# Allegro board SATROT-2-7.brd
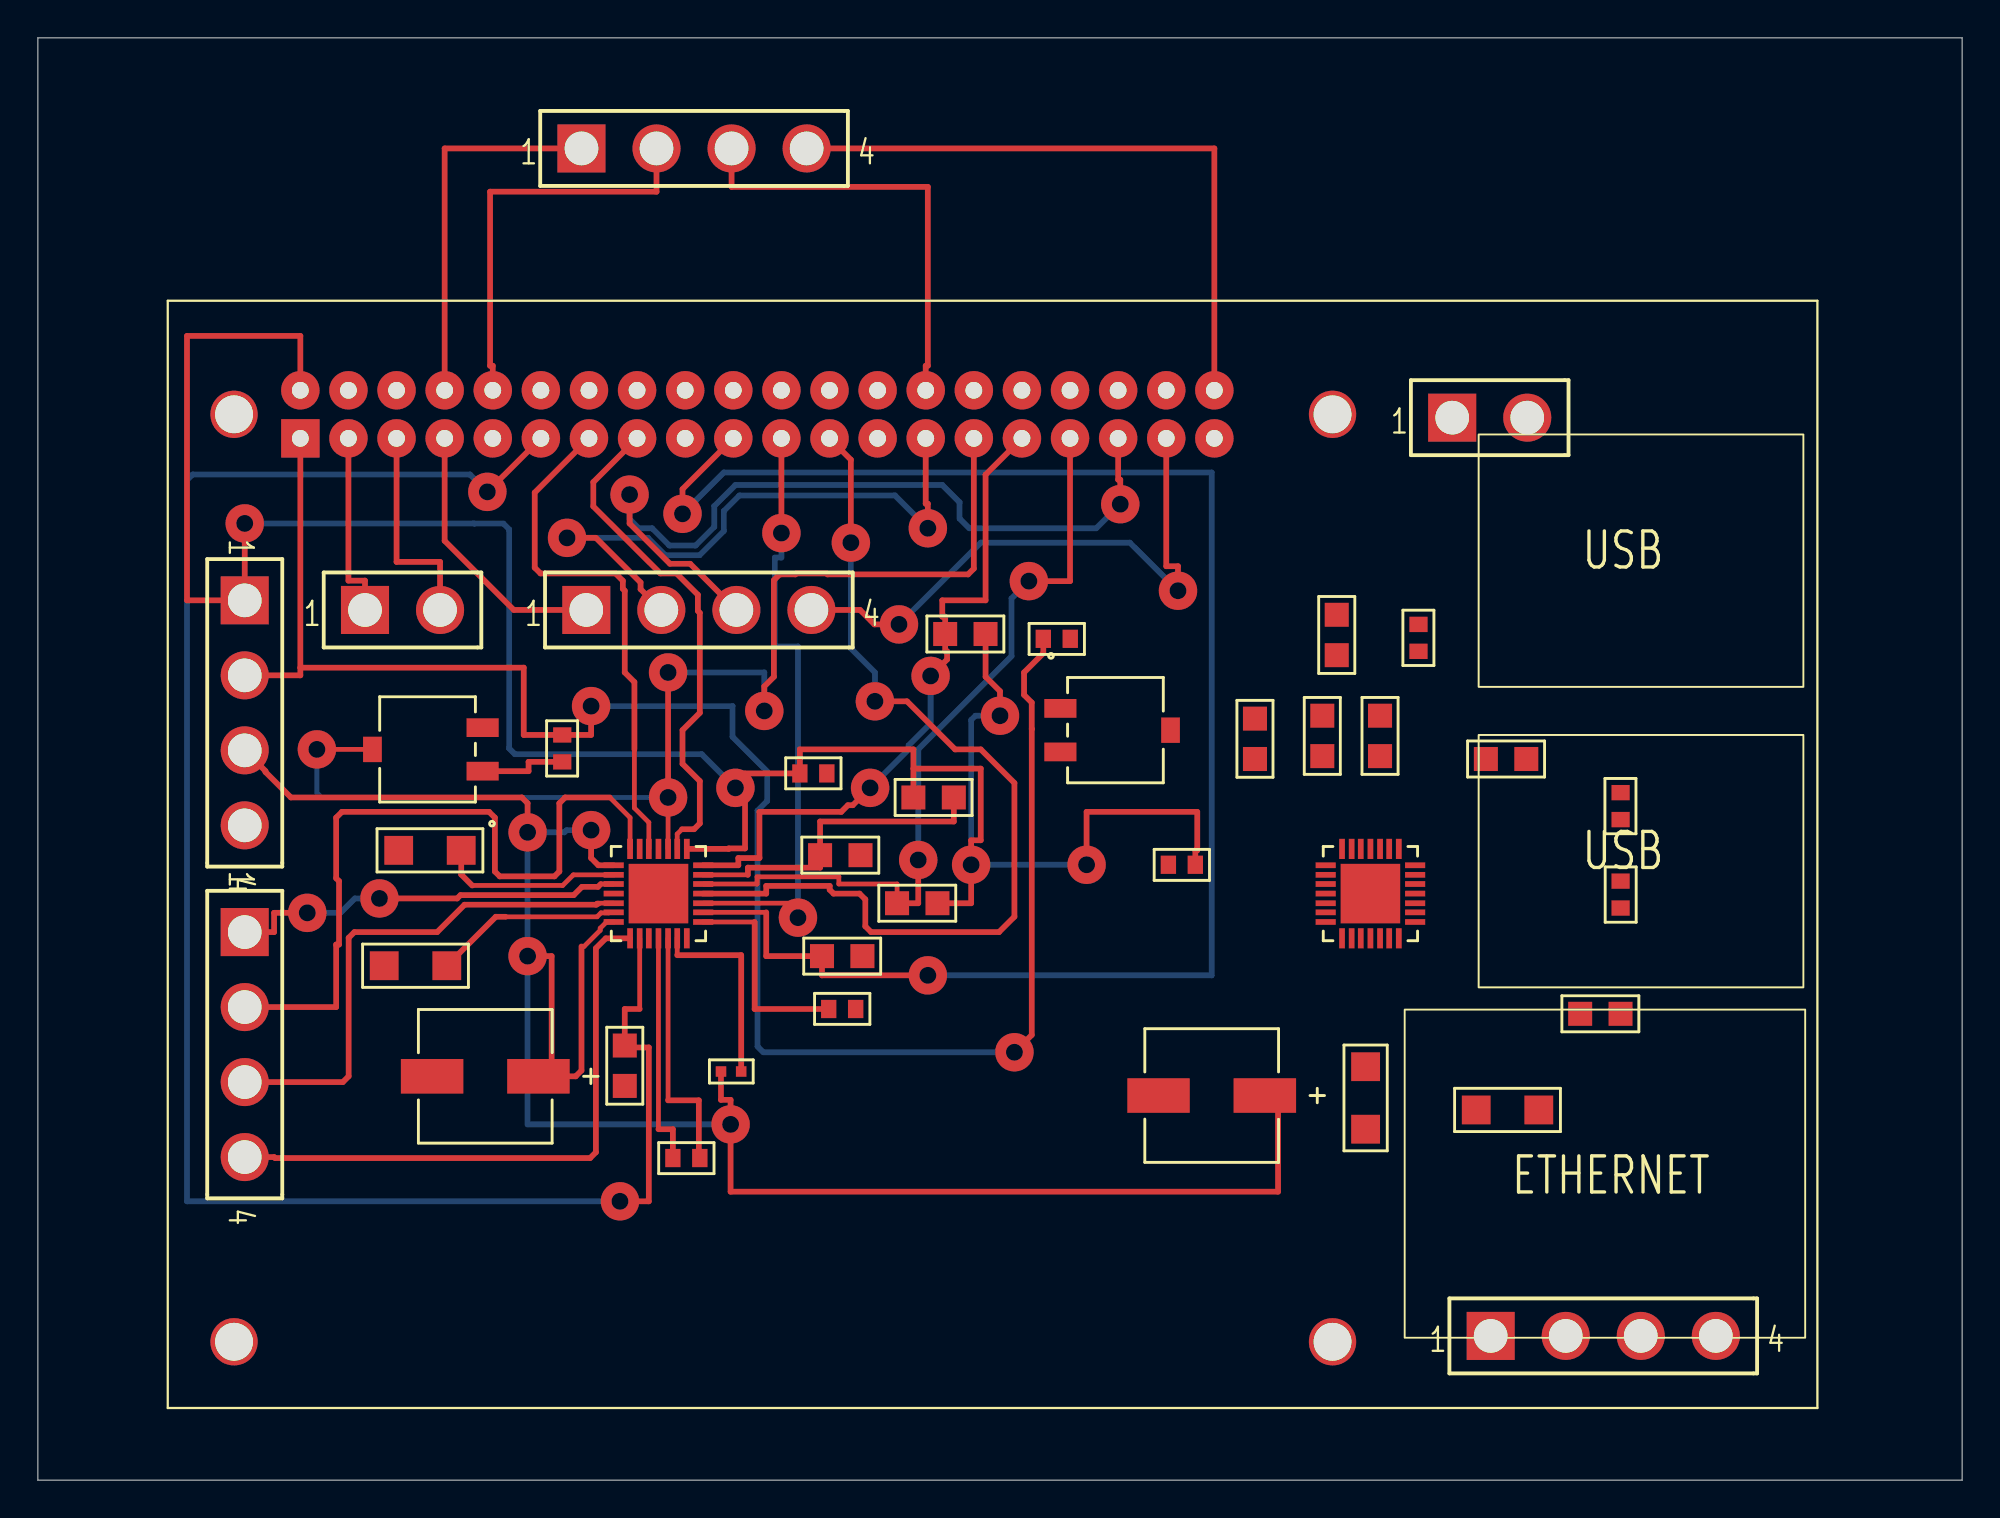
[diagram p0: board, top side]
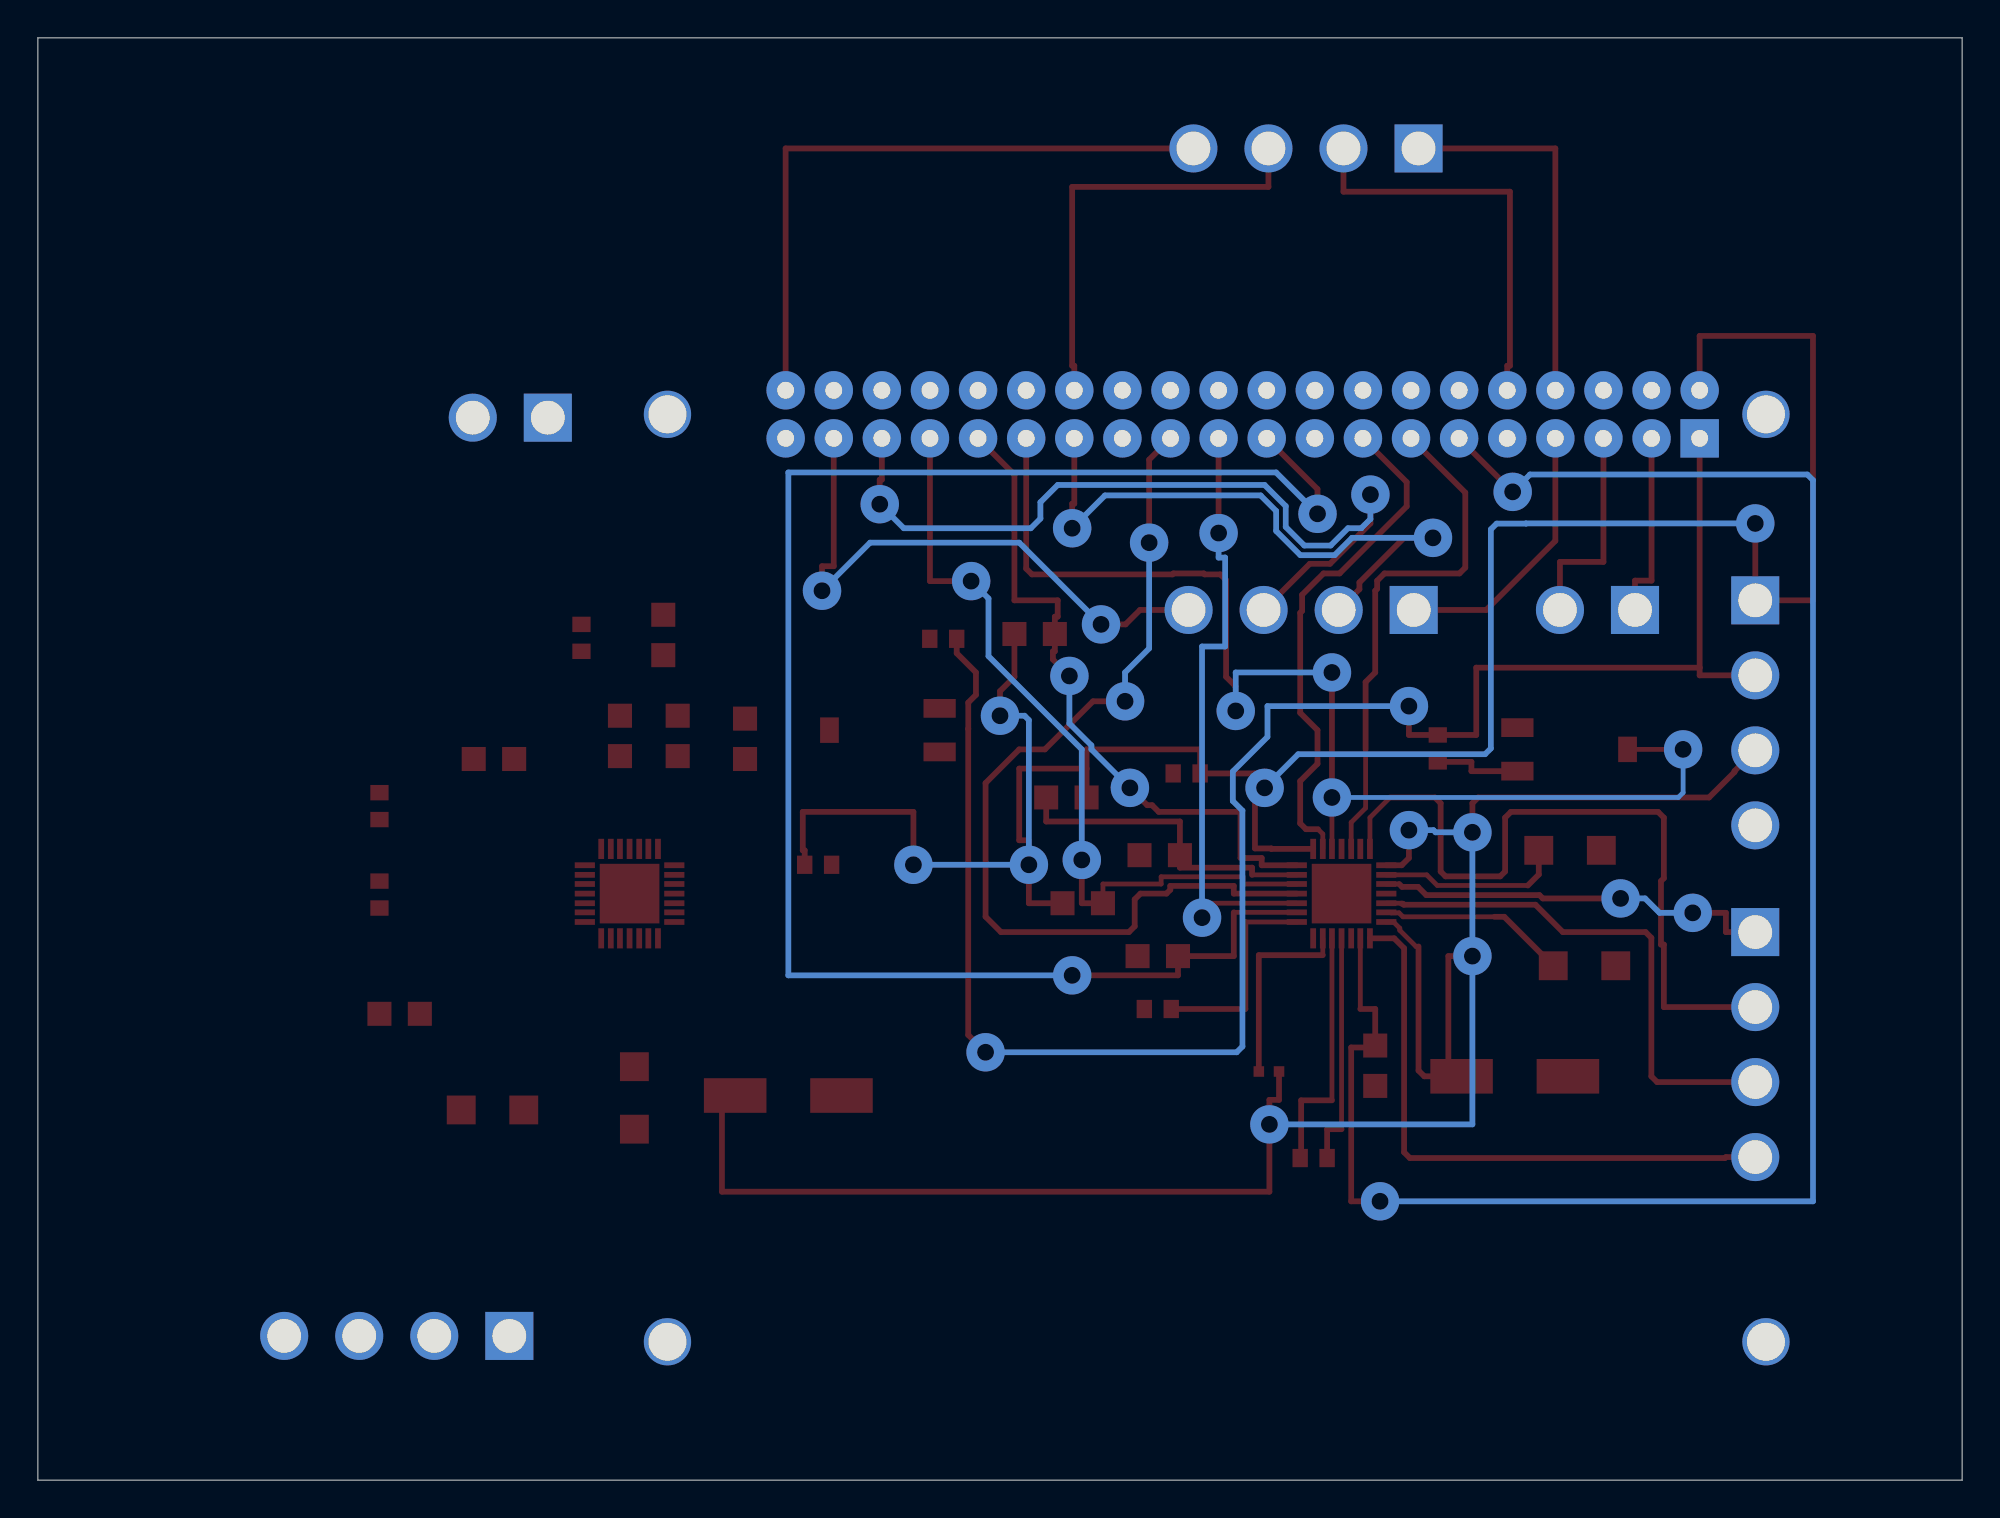
[diagram p1: board, bottom side, seen from below]

Outline 101.6 x 76.2 mm; copper layers: TOP, BOTTOM. Coordinates in mm from the lower left corner of the outline.
Outline path: 0,76.2 101.6,76.2 101.6,0 0,0 0,76.2

## Design rules (mm)
constraint set DEFAULT: min track width 0.305

## Placement (name value [footprint] x y rotation side)
C1  0.1 uF  [SMC0603]  33.53 17.02 0 top
C2  0.22 uF  [SMC0603]  43.18 24.89 180 top
C3  0.1 uF  [SMC0402]  36.07 21.59 0 top
C4  100 uF  [PCAP_SVP_C6-M]  23.62 21.34 180 top
C5  0.22 uF  [SMC0603]  41.66 37.34 180 top
C6  0.1 uF  [SMC0603]  83.57 30.23 90 top
C7  0.22 uF  [SMC0603]  72.9 45.21 270 top
C8  0.1 uF  [SMC0603]  83.57 36.32 270 top
C9  100 uF  [PCAP_SVP_C6-M]  61.98 20.32 180 top
C10  0.22 uF  [SMC0603]  59.69 32.51 0 top
J2  Az Stepper  [BLKCON156VHTM1SQSW1564]  10.92 28.96 270 top
J3  Motor Power  [BLKCON156VHTM1SQSW1562]  74.68 56.13 0 top
J4  Power Connector  [BLKCON156VHTM1SQSW1564]  10.92 46.48 270 top
J5  El Stepper  [BLKCON156VHTM1SQSW1564]  76.71 7.62 0 top
J6  R_PINs  [BLKCON156VHTM1SQSW1564]  28.7 70.36 0 top
J7  L_PINs  [BLKCON156VHTM1SQSW1564]  28.96 45.97 0 top
J8  I2C  [BLKCON156VHTM1SQSW1562]  17.27 45.97 0 top
R1  10K  [SMR0805]  43.43 33.02 180 top
R2  NP  [SMR0805]  46.23 36.07 0 top
R3  100k  [SMR0805]  47.5 30.48 180 top
R4  100k  [SMR0805]  50.04 44.7 180 top
R5  10K POT  [SOT_10KLFTR]  20.57 38.61 90 top
R6  20K  [SMR0603]  27.69 39.37 270 top
R7  NP  [SMR0805]  41.4 27.69 0 top
R8  100k  [SMR0805]  30.99 20.83 90 top
R9  0.05  [SMR1206]  22.35 33.27 180 top
R10  0.05  [SMR1206]  21.59 27.18 180 top
R11  10K  [SMR0805]  68.58 45.72 270 top
R12  NP  [SMR0805]  67.82 40.39 270 top
R13  100k  [SMR0805]  70.87 40.39 270 top
R14  100k  [SMR0805]  64.26 38.1 90 top
R15  10K POT  [SOT_10KLFTR]  56.9 39.62 270 top
R16  20K  [SMR0603]  53.09 44.45 0 top
R17  NP  [SMR0805]  76.45 38.1 0 top
R18  100k  [SMR0805]  83.57 24.64 180 top
R19  0.05  [SMR1206]  70.1 21.84 270 top
R20  0.05  [SMR1206]  75.95 19.56 0 top
U1  A4988SETTR-T  [QFN50P500X500X100-29N]  32.77 30.99 90 top
U2  A4988SETTR-T  [QFN50P500X500X100-29N]  70.36 30.99 180 top
U3  Raspberry Pi B+  [GU-RASP-PI-3]  6.86 3.81 0 top

## Library data of the parts
C1-C3 C5-C8 C10 = CAP NP
C4 C9 = CAP POL: User Part Number: PN; Tolerance: TOL
J2 J4-J7 = 4 HEADER
J3 = CON2
J8 = HEADER 2
R1-R4 R6-R14 R16-R20 = R
R5 R15 = POT: User Part Number: PN; Tolerance: TOL
U1 U2 = A4988SETTR-T
U3 = Raspberry Pi B+

## Footprints (pads in the part's own frame, mm; a bottom-side part is the same pattern mirrored in y, then rotated)
BLKCON156VHTM1SQSW1562
  rect 2.54x2.54 hole 1.778: 1(0,0)
  round 2.54 hole 1.778: 2(3.962,0)
BLKCON156VHTM1SQSW1564
  rect 2.54x2.54 hole 1.778: 1(0,0)
  round 2.54 hole 1.778: 2(3.962,0) 3(7.925,0) 4(11.887,0)
GU-RASP-PI-3
  round 2.5 hole 2 unplated: (3.5,52.5) (3.5,3.5) (61.5,52.5) (61.5,3.5)
  rect 2.032x2.032 hole 0.889: 1(7,51.23)
  round 2.032 hole 0.889: 2(7,53.77) 3(9.54,51.23) 4(9.54,53.77) 5(12.08,51.23) 6(12.08,53.77) 7(14.62,51.23) 8(14.62,53.77) 9(17.16,51.23) 10(17.16,53.77) 11(19.7,51.23) 12(19.7,53.77) 13(22.24,51.23) 14(22.24,53.77) 15(24.78,51.23) 16(24.78,53.77) 17(27.32,51.23) 18(27.32,53.77) 19(29.86,51.23) 20(29.86,53.77) 21(32.4,51.23) 22(32.4,53.77) 23(34.94,51.23) 24(34.94,53.77) 25(37.48,51.23) 26(37.48,53.77) 27(40.02,51.23) 28(40.02,53.77) 29(42.56,51.23) 30(42.56,53.77) 31(45.1,51.23) 32(45.1,53.77) 33(47.64,51.23) 34(47.64,53.77) 35(50.18,51.23) 36(50.18,53.77) 37(52.72,51.23) 38(52.72,53.77) 39(55.26,51.23) 40(55.26,53.77)
PCAP_SVP_C6-M
  rect 3.302x1.829 smd: 1(-2.807,0) 2(2.807,0)
QFN50P500X500X100-29N
  rect 1.067x0.305 smd: 1(-2.362,1.499) 2(-2.362,0.991) 3(-2.362,0.508) 4(-2.362,0) 5(-2.362,-0.508) 6(-2.362,-0.991) 7(-2.362,-1.499) 15(2.362,-1.499) 16(2.362,-0.991) 17(2.362,-0.508) 18(2.362,0) 19(2.362,0.508) 20(2.362,0.991) 21(2.362,1.499)
  rect 0.305x1.067 smd: 8(-1.499,-2.362) 9(-0.991,-2.362) 10(-0.508,-2.362) 11(0,-2.362) 12(0.508,-2.362) 13(0.991,-2.362) 14(1.499,-2.362) 22(1.499,2.362) 23(0.991,2.362) 24(0.508,2.362) 25(0,2.362) 26(-0.508,2.362) 27(-0.991,2.362) 28(-1.499,2.362)
  rect 3.15x3.15 smd: 29(0,0)
SMC0402
  rect 0.559x0.559 smd: 1(0,0) 2(1.067,0)
SMC0603
  rect 0.813x0.965 smd: 1(0,0) 2(1.422,0)
SMR0603
  rect 0.813x0.965 smd: 1(0,0) 2(1.422,0)
SMR0805
  rect 1.27x1.27 smd: 1(0,0) 2(2.134,0)
SMR1206
  rect 1.524x1.524 smd: 1(0,0) 2(3.302,0)
SOT_10KLFTR
  rect 0.991x1.702 smd: 1(-1.15,-2.908) 3(1.15,-2.908)
  rect 1.346x0.991 smd: 2(0,2.908)

## Nets
3V3: J4.2 R6.1 R16.1 U3.1
GND: C2.1 C4.2 C5.1 C7.1 C9.2 C10.1 J3.2 J4.4 R1.1 R5.3 R7.2 R8.1 R9.2 R10.2 R11.1 R15.3 R17.2 R18.1 R19.2 R20.2 U1.3 U1.18 U1.29 U2.3 U2.18 U2.29 U3.9
GND1: U3.6
GND3: U3.14
GND4: U3.20
GND5: U3.25
GND6: U3.30
GND7: U3.34
GND8: U3.39
P3V3: U3.17
P5V: U3.4(P5V#4)
VDD: C5.2 C10.2 J4.1 R2.1 R3.1 R4.1 R12.1 R13.1 R14.1 U1.15 U2.15 U3.2
7/GPIO: J7.1 U3.7
19/GPIO: J7.3 U3.35
27/RESERVED: J7.2 U3.27
28/RESERVED: J6.3 U3.28
37/GPIO: J7.4 U3.37
GPIO: J6.4 U3.40
GPIO/RX: J6.2 U3.10
GPIO/TX: J6.1 U3.8
VMM: C3.1 C4.1 C8.1 C9.1 J3.1 J4.3 U1.22 U1.28 U2.22 U2.28
N00486: J2.1 U1.24
N00488: J2.2 U1.21
N00490: J2.3 U1.26
N00492: J2.4 U1.1
N00665: R1.2 R2.2 U1.13
N00675: R3.2 U1.12 U3.33
N00682: R4.2 U1.14(~SLEEP) U3.31
N00813: R5.1 R6.2
N01051: R5.2(WIPER) U1.17 U3.29
N01158: R8.2 U1.2 U3.11
N01167: R7.1 U1.9 U3.19
N01261: R10.1 U1.27
N01273: R9.1 U1.23
N01454: C1.1 U1.4
N01461: C1.2 U1.5
N01528: C2.2 U1.8
N01594: C3.2 U1.6
N04587: J5.1 U2.24
N04591: J5.2 U2.21
N04595: J5.3 U2.26
N04599: J5.4 U2.1
N04699: R11.2 R12.2 U2.13
N04707: R13.2 U2.12 U3.38
N04715: R14.2 U2.14(~SLEEP) U3.36
N04769: R15.1 R16.2
N04789: R15.2(WIPER) U2.17 U3.32
N04853: R18.2 U2.2 U3.12
N04861: R17.1 U2.9 U3.22
N04909: R20.1 U2.27
N04921: R19.1 U2.23
N04961: C6.1 U2.4
N04969: C6.2 U2.5
N04997: C7.2 U2.8
N05017: C8.2 U2.6
N05607: U1.19 U3.13
N05619: U1.16 U3.15
N05647: U1.10 U3.21
N05659: U1.11 U3.23
N05690: U2.19 U3.16
N05705: U2.16 U3.18
N05729: U2.10 U3.24
N05742: U2.11 U3.26
N09636: J8.1 U3.3
N09640: J8.2 U3.5

Pads without a net: U1 7 20 25; U2 7 20 25

## Via types
v1: diameter 2.032, hole 0.889, TOP to BOTTOM, 35 vias

## Routing (per net, layer and track width the routed paths; a pad name or vN(x,y) marks a point on that pad's centre or on a via; arc(x,y) is an arc through that point)
3V3: length 98.8
  TOP w0.305: 13.86,42.93 U3.1 ; 13.86,42.93 13.86,42.52 J4.2 ; 13.86,42.93 25.65,42.93 25.65,39.37 R6.1 29.21,39.37 v1(29.21,40.89) ; v1(51.56,22.61) 52.48,23.52 52.48,39.69 52.48,39.69 52.48,41.08 52.07,41.49 52.07,42.67 53.09,43.69 R16.1
  BOTTOM w0.305: v1(51.56,22.61) 38.3,22.61 38,22.91 38,35.37 38.51,35.88 38.51,37.44 36.68,39.27 36.68,40.89 v1(29.21,40.89)
VDD: length 133.2
  TOP w0.305: v1(36.83,36.58) 37.34,36.58 ; 37.34,36.58 37.34,37.34 C5.2 40.23,38.61 46.23,38.61 46.23,37.59 ; 37.34,36.58 37.34,33.38 36.47,33.38 36.47,33.35 U1.15 ; v1(55.37,32.51) 55.37,35.31 61.21,35.31 61.21,33.27 61.11,33.27 C10.2 ; U3.2 13.86,60.45 7.87,60.45 7.87,46.48 J4.1 v1(10.92,50.55) ; 46.23,37.59 R2.1 ; 46.23,37.59 49.78,37.59 49.78,33.81 49.28,33.81 v1(49.28,32.51) 49.28,30.48 R3.1 ; v1(50.8,40.39) 50.8,41.68 50.04,42.44 R4.1
  BOTTOM w0.305: v1(55.37,32.51) v1(49.28,32.51) 49.28,40.16 49.5,40.39 v1(50.8,40.39) ; v1(36.83,36.58) 35.05,38.35 25.19,38.35 24.88,38.66 24.88,50.23 24.58,50.54 23.04,50.54 23.03,50.55 v1(10.92,50.55)
7/GPIO: length 14.4
  TOP w0.305: U3.7 21.48,49.63 25.13,45.97 J7.1
19/GPIO: length 44.4
  TOP w0.305: v1(57.15,51.56) 57.15,52.86 57.04,52.86 U3.35 ; v1(31.24,52.07) 31.24,50.55 33.38,48.41 34.44,48.41 J7.3
  BOTTOM w0.305: v1(31.24,52.07) 31.24,50.77 31.72,50.29 32.43,50.29 33.34,49.38 34.73,49.38 35.71,50.36 35.71,51.46 36.83,52.58 47.75,52.58 48.67,51.66 48.67,50.8 49.17,50.29 55.88,50.29 v1(57.15,51.56)
27/RESERVED: length 33.7
  TOP w0.305: v1(46.99,50.29) 46.99,51.59 46.88,51.59 U3.27 ; J7.2 31.82,47.07 31.82,47.43 29.46,49.78 v1(27.94,49.78)
  BOTTOM w0.305: v1(27.94,49.78) 32.22,49.78 33.13,48.87 34.94,48.87 36.22,50.15 36.22,51.21 37.04,52.02 45.26,52.02 v1(46.99,50.29)
28/RESERVED: length 23.3
  TOP w0.305: J6.3 36.63,68.33 46.99,68.33 46.99,58.88 46.88,58.88 U3.28
37/GPIO: length 31.2
  TOP w0.305: v1(60.2,46.99) 60.2,48.29 59.58,48.29 U3.37 ; J7.4 43.41,45.97 44.17,45.21 v1(45.47,45.21)
  BOTTOM w0.305: v1(60.2,46.99) 57.66,49.53 49.78,49.53 v1(45.47,45.21)
GPIO: length 34.3
  TOP w0.305: U3.40 62.12,70.36 J6.4
GPIO/RX: length 21.7
  TOP w0.305: J6.2 32.66,68.07 23.88,68.07 23.88,58.88 24.02,58.88 U3.10
GPIO/TX: length 20
  TOP w0.305: U3.8 21.48,70.36 J6.1
VMM: length 110.5
  TOP w0.254: U1.28 30.02,29.49 29.69,29.16 29.69,29.05 28.84,28.19 28.7,28.19
  TOP w0.305: v1(29.21,34.34) 29.21,32.87 29.59,32.49 U1.22 ; 28.7,28.19 28.7,21.64 28.4,21.34 27.13,21.34 ; J4.3 12.02,37.46 12.02,37.41 13.36,36.07 25.55,36.07 25.86,35.76 v1(25.86,34.23) ; v1(25.86,27.69) 27.13,27.69 27.13,21.34 ; C3.1 36.07,20.09 36.58,20.09 v1(36.58,18.8) 36.58,15.24 65.48,15.24 65.48,20.32 C9.1 ; 27.13,21.34 C4.1
  BOTTOM w0.305: v1(36.58,18.8) 25.86,18.8 v1(25.86,27.69) v1(25.86,34.23) 27.8,34.23 27.91,34.34 v1(29.21,34.34)
N00486: length 21.1
  TOP w0.254: 29.72,31.5 U1.24
  TOP w0.305: 29.72,31.5 29.57,31.34 28.73,31.34 28.29,30.91 22.32,30.91 22.14,30.73 v1(18.03,30.73) ; J2.1 12.47,28.96 12.47,29.97 v1(14.22,29.97)
  BOTTOM w0.305: v1(14.22,29.97) 15.98,29.97 16.74,30.73 v1(18.03,30.73)
N00488: length 39.7
  TOP w0.254: 30.2,36.07 31.27,35 U1.21
  TOP w0.305: J2.2 15.75,24.99 15.75,28.3 15.9,28.3 15.9,31.65 15.75,31.8 15.75,35 16.05,35.31 23.83,35.31 24.13,35 24.13,32.16 24.39,31.9 27.28,31.9 27.53,32.16 27.53,35.76 27.84,36.07 30.2,36.07
N00490: length 27.7
  TOP w0.254: 29.59,30.45 29.62,30.48 U1.26
  TOP w0.305: 29.59,30.45 29.53,30.45 29.48,30.4 22.53,30.4 21.08,28.96 16.71,28.96 16.41,28.65 16.41,21.34 16.1,21.03 J2.3
N00492: length 31.5
  TOP w0.305: U1.1 29.99,28.63 29.46,28.1 29.46,17.32 29.16,17.02 12.52,17.02 12.47,17.07 J2.4
N00665: length 17.3
  TOP w0.254: 37.49,31.98 U1.13
  TOP w0.305: R2.2 48.36,34.8 41.3,34.8 R1.2 41.3,32.36 37.49,32.36 37.49,31.98
N00675: length 42.3
  TOP w0.254: U1.12 37.97,31.5 37.97,31.88 42.29,31.88 42.29,31.5 45.36,31.5 R3.2
  TOP w0.305: R3.2 46.48,30.48 v1(46.48,32.77) ; v1(52.32,47.5) 54.5,47.5 U3.33
  BOTTOM w0.305: v1(52.32,47.5) 51.41,46.58 51.41,43.53 46.48,38.61 v1(46.48,32.77)
N00682: length 35.6
  TOP w0.305: v1(43.94,36.58) 43.03,35.66 42.77,35.66 42.42,35.31 38.1,35.31 38.1,32.87 36.98,32.87 36.98,32.49 U1.14 ; v1(47.14,42.49) 48.01,43.36 48.01,43.79 47.9,43.79 R4.2 47.9,45.62 47.75,45.62 47.75,46.48 50.04,46.48 50.04,53.12 U3.31
  BOTTOM w0.305: v1(47.14,42.49) 47.14,39.98 45.97,38.82 45.97,38.61 v1(43.94,36.58)
N00813: length 4.7
  TOP w0.305: R5.1 25.91,37.46 25.91,37.95 R6.2
N01051: length 65.2
  TOP w0.254: v1(33.27,36.07) U1.17 ; v1(14.73,38.61) R5.2
  TOP w0.305: v1(38.35,40.64) 38.35,41.94 38.86,42.44 38.86,47.55 39.17,47.85 39.99,47.85 40.04,47.9 41.64,47.9 41.69,47.85 49.11,47.85 49.42,48.16 U3.29 ; v1(33.27,42.67) v1(33.27,36.07)
  BOTTOM w0.254: v1(33.27,36.07) 14.99,36.07 14.73,36.32 v1(14.73,38.61)
  BOTTOM w0.305: v1(38.35,40.64) 38.35,42.67 v1(33.27,42.67)
N01158: length 98.7
  TOP w0.254: U1.2 31.78,24.89
  TOP w0.305: U3.11 v1(23.73,52.21) ; 31.78,24.89 30.99,24.89 R8.2 31.09,22.86 32.26,22.86 32.26,14.73 v1(30.73,14.73)
  BOTTOM w0.305: v1(23.73,52.21) 22.82,53.13 8.17,53.13 7.87,52.83 7.87,14.73 v1(30.73,14.73)
N01167: length 90.7
  TOP w0.254: U1.9 38.46,30
  TOP w0.305: 38.46,30 38.46,27.69 R7.1 41.4,26.67 v1(46.99,26.67) ; U3.19 34.04,52.36 v1(34.04,51.05)
  BOTTOM w0.305: v1(34.04,51.05) 36.22,53.24 61.98,53.24 61.98,26.67 v1(46.99,26.67)
N01261: length 10
  TOP w0.254: U1.27 30.17,30 30.14,29.97 29.73,29.97 29.53,29.76 24.68,29.76
  TOP w0.305: 24.68,29.76 24.18,29.76 R10.1
N01273: length 9.8
  TOP w0.254: 22.93,31.42 27.71,31.42 28.27,31.98 U1.23
  TOP w0.305: 22.93,31.42 22.35,32 R9.1
N01454: length 12.4
  TOP w0.254: U1.4 32.77,18.54
  TOP w0.305: C1.1 33.53,18.54 32.77,18.54
N01461: length 13.3
  TOP w0.254: 33.27,20.07 U1.5
  TOP w0.305: C1.2 34.95,17.12 34.9,17.12 34.9,20.07 33.27,20.07
N01528: length 11.2
  TOP w0.254: U1.8 37.85,29.49
  TOP w0.305: C2.2 37.85,24.89 37.85,29.49
N01594: length 10.4
  TOP w0.254: U1.6 33.76,27.74
  TOP w0.305: 33.76,27.74 37.13,27.74 C3.2
N05607: length 27.7
  TOP w0.254: 31.5,38.61 31.5,35.51 32.26,34.75 U1.19
  TOP w0.305: 31.5,38.61 31.5,42.16 30.99,42.67 30.99,46.99 30.89,47.09 30.89,47.52 30.5,47.9 26.54,47.9 26.23,48.21 26.23,52.18 U3.13
N05619: length 27.1
  TOP w0.254: U1.16 33.76,34.14 34.01,34.39
  TOP w0.305: 34.01,34.39 34.65,34.39 34.95,34.7 34.95,36.93 34.04,37.85 34.04,39.62 34.95,40.54 34.95,45.82 34.85,45.92 34.85,46.77 33.72,47.9 32.87,47.9 29.33,51.45 29.33,52.73 U3.15
N05647: length 32.7
  TOP w0.254: U1.10 40.13,30.48
  TOP w0.305: 40.13,30.48 v1(40.13,29.72) ; U3.21 v1(39.26,50.04)
  BOTTOM w0.305: v1(39.26,50.04) 39.26,48.74 38.91,48.74 38.91,44.04 40.13,44.04 v1(40.13,29.72)
N05659: length 50.2
  TOP w0.305: v1(44.2,41.15) 45.89,41.15 48.43,38.61 49.78,38.61 51.56,36.83 51.56,29.77 50.75,28.96 43.99,28.96 43.69,29.26 43.69,30.68 43.38,30.99 42.01,30.99 41.81,31.19 41.81,31.39 38.46,31.39 38.46,30.99 U1.11 ; U3.23 42.93,53.91 v1(42.93,49.53)
  BOTTOM w0.305: v1(44.2,41.15) 44.2,42.67 42.93,43.94 v1(42.93,49.53)
N09636: length 9.9
  TOP w0.305: U3.3 16.4,47.52 17.27,47.52 J8.1
N09640: length 11.4
  TOP w0.305: U3.5 18.94,48.51 21.23,48.51 J8.2
